# Altium PCB base_led_cube.PcbDoc
Units mil, origin at the board's own origin, x right, y up, seen from the top; angles counter-clockwise.
Board outline 4915 x 2750 mil, 2 copper layers (Top Layer, Bottom Layer); 90 components, 154 nets, 315 pads, 0 vias.
Unrouted connection lines stored in the file: 1.
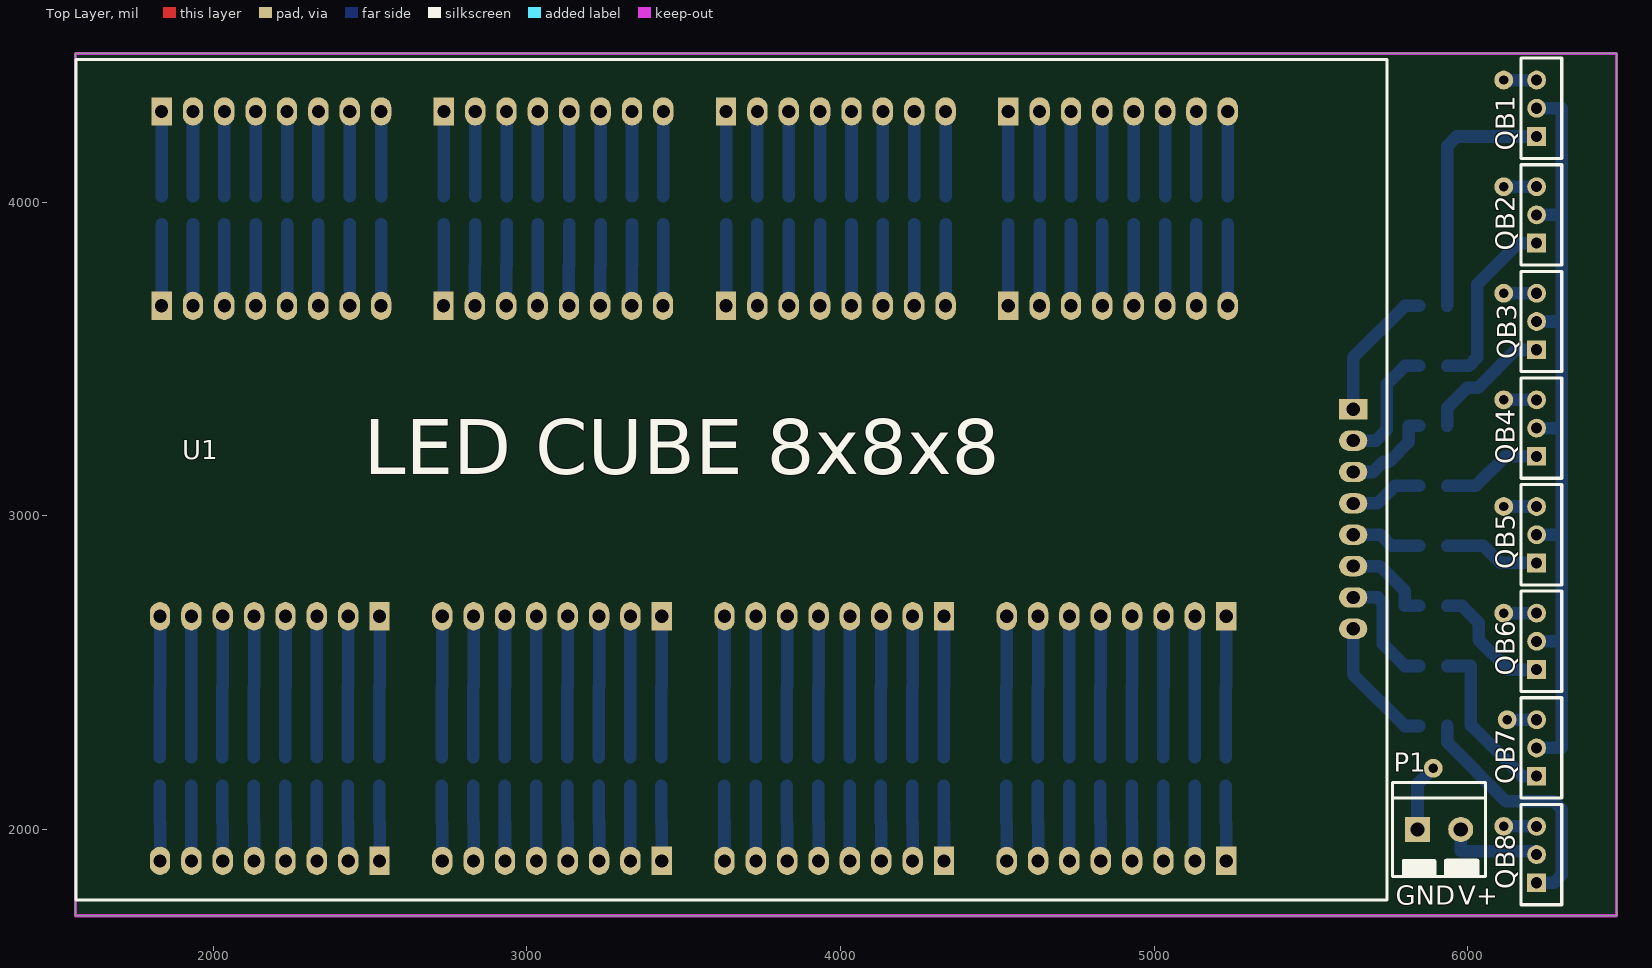
[diagram p0: Top Layer view]
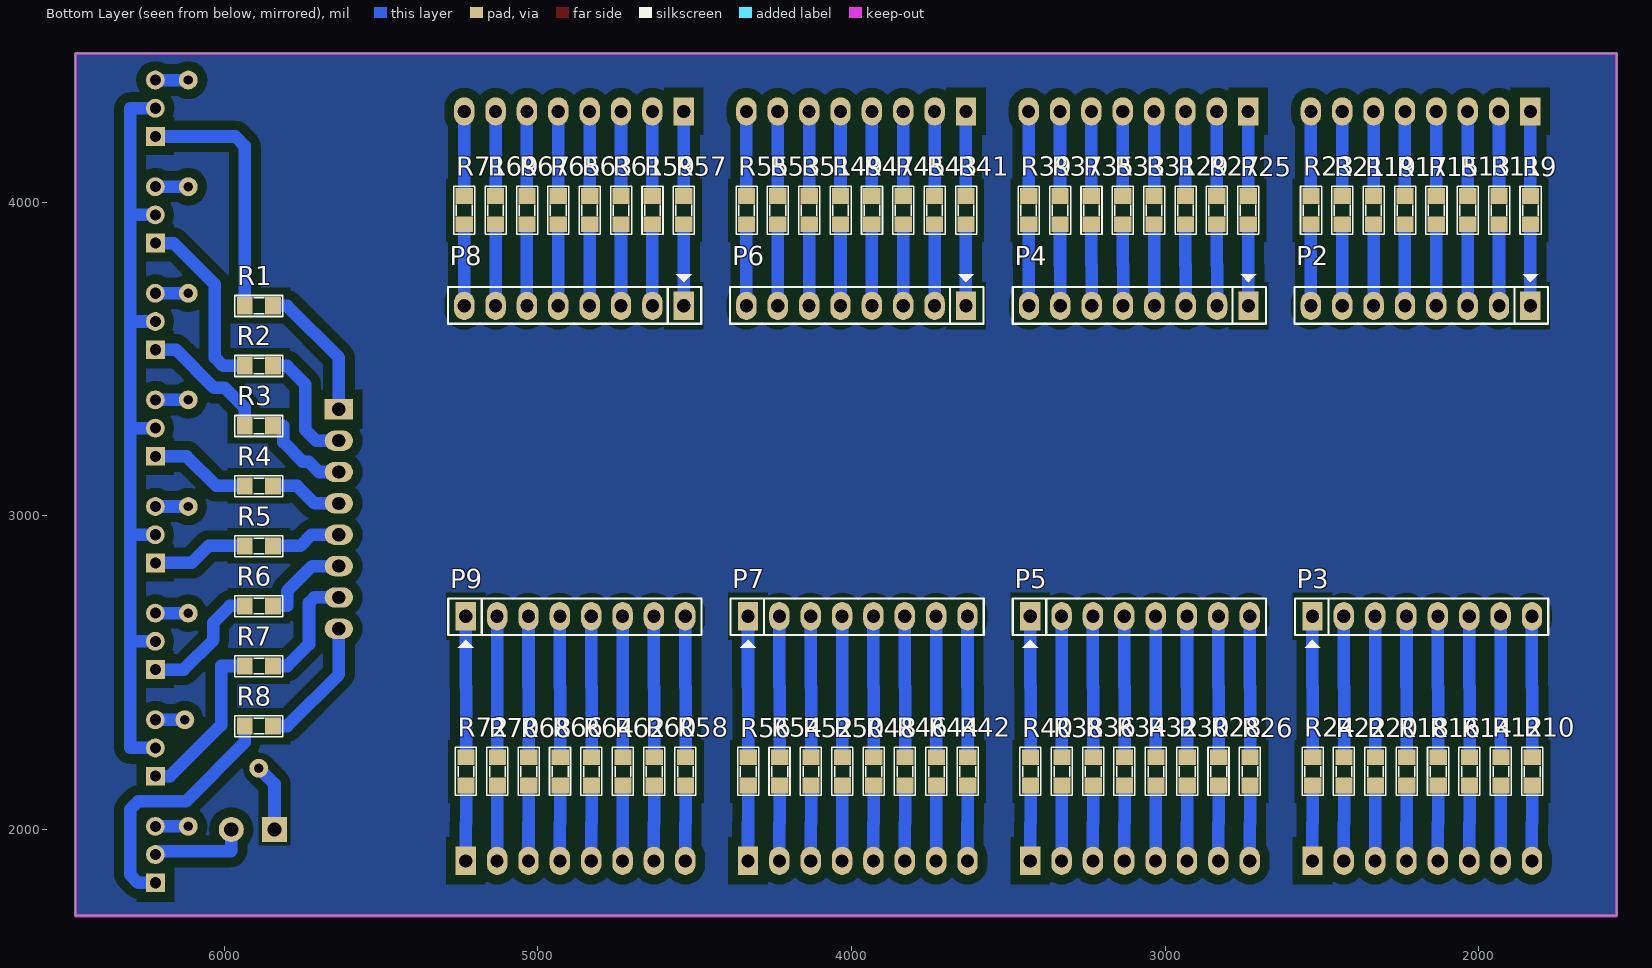
[diagram p1: Bottom Layer view, seen from below]
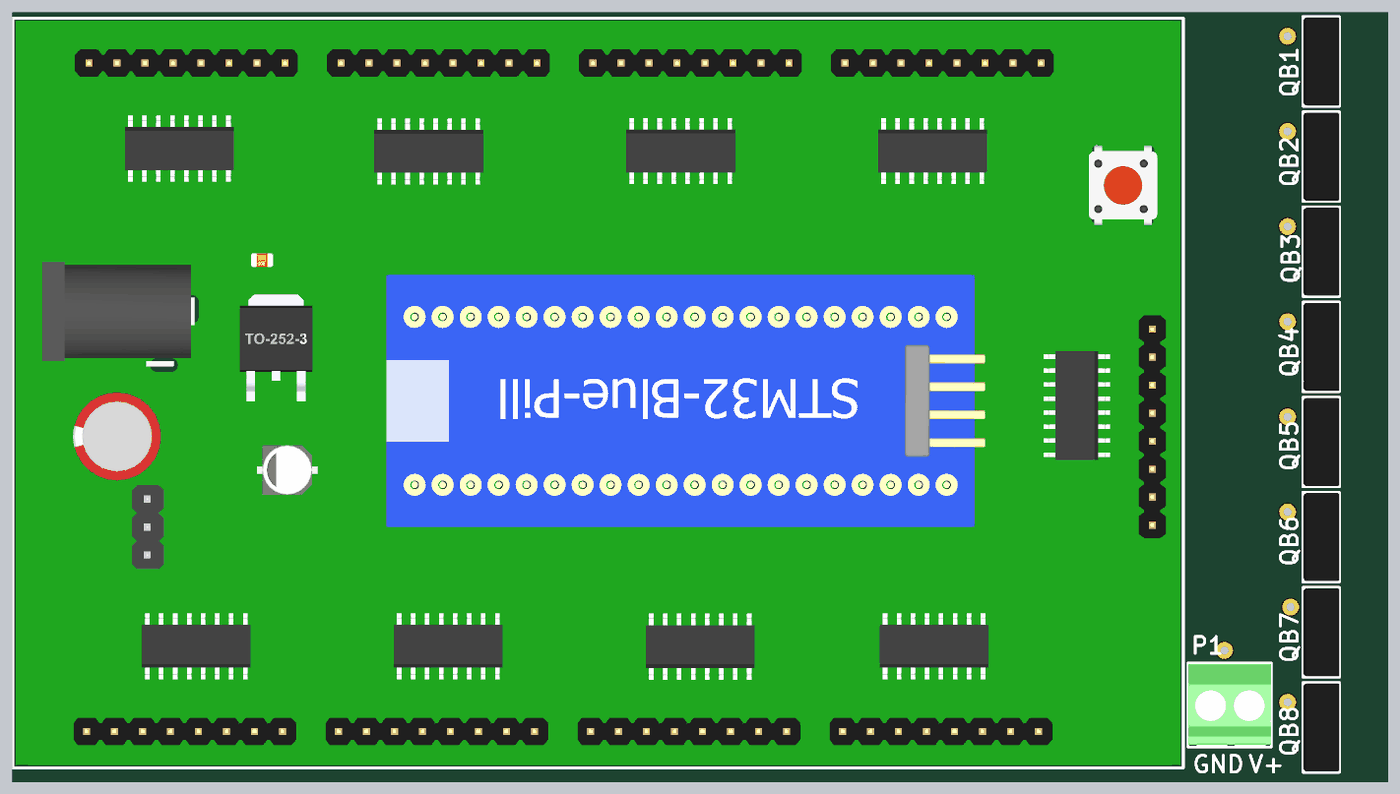
[diagram p2: 3D render of the assembled board from above, using the file's embedded part models]
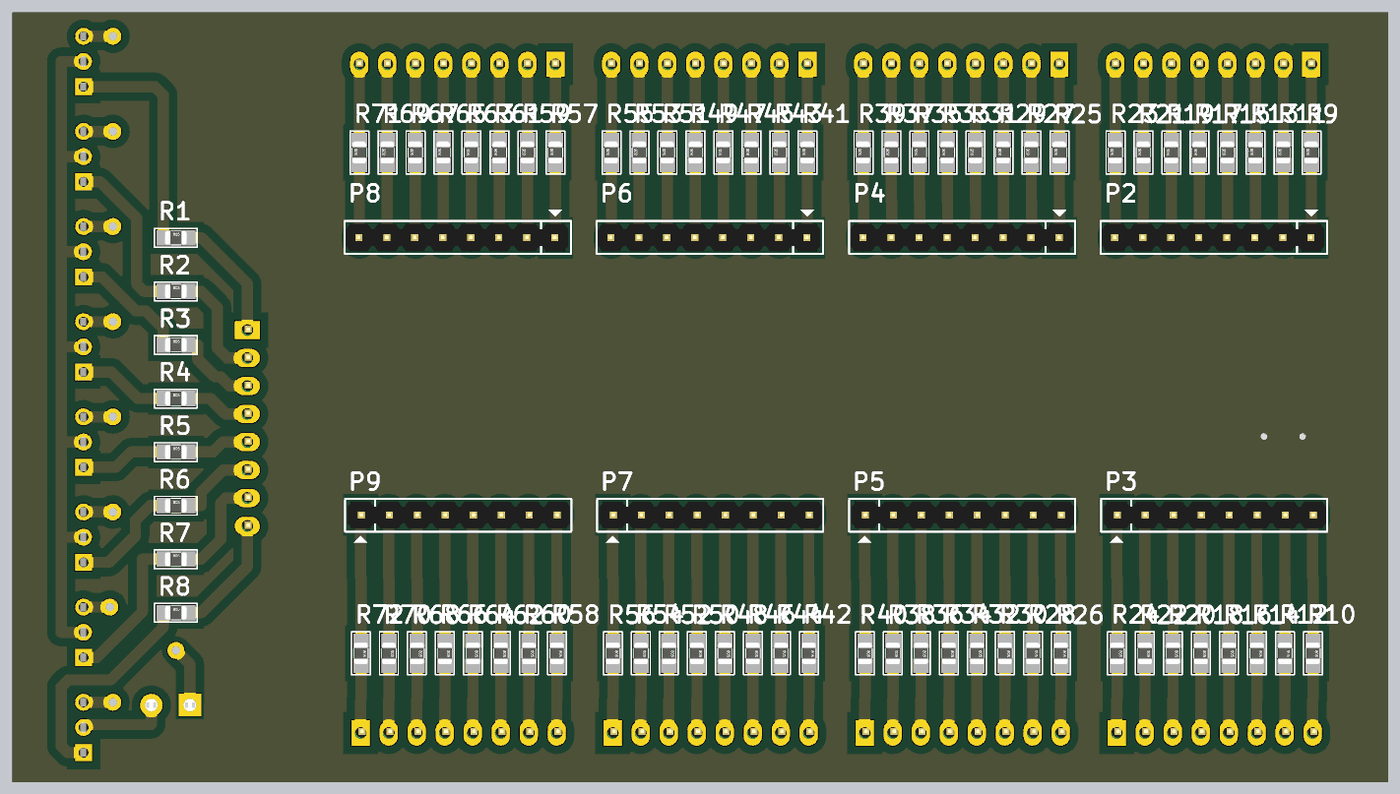
[diagram p3: 3D render of the assembled board from below, using the file's embedded part models]

## Layer stack, top to bottom
Top Solder: solder mask 0.4, Solder Resist, Dk 3.5
Top Layer: signal copper 1.4
Dielectric 1: dielectric 12.6, FR-4, Dk 4.8
Bottom Layer: signal copper 1.4
Bottom Solder: solder mask 0.4, Solder Resist, Dk 3.5

## Board outline
1560,1725 6475,1725 6475,4475 1560,4475

## Design rules (kind name [scope] priority, off if disabled: settings)
Clearance [All] p1: gap=30 ignorepadtopadclearanceinfootprint=FALSE
PolygonConnect [All] p1: connectstyle=Relief reliefconductorwidth=10 reliefentries=4 polygonreliefangle="90 Angle" airgapwidth=10
RoutingVias [All] p1: holewidth=28 width=50 viastyle="Through Hole" minholewidth=28 minwidth=50 maxholewidth=28 maxwidth=50
SolderMaskExpansion [All] p1: expansion=4
Width [All] p1: maxlimit=100 minlimit=10 preferedwidth=40
30 further rules are at their usual default settings.

## Components (designator, comment, footprint, x,y, rotation, side; value= is the part's Value field where it differs from the comment)
P1 "Domino 2" "DOMINO SMALL 2" 5840,2050 r0 top
P2 "Header 8" JP8 1835,3670 r0 bottom
P3 "Header 8" JP8 2530,2680 r180 bottom
P4 "Header 8" JP8 2734,3670 r0 bottom
P5 "Header 8" JP8 3430,2680 r180 bottom
P6 "Header 8" JP8 3635,3670 r0 bottom
P7 "Header 8" JP8 4330,2680 r180 bottom
P8 "Header 8" JP8 4535,3670 r0 bottom
P9 "Header 8" JP8 5230,2680 r180 bottom
QB1 "B772" To-126 6220,4210 r90 top
QB2 "B772" To-126 6220,3870 r90 top
QB3 "B772" To-126 6220,3530 r90 top
QB4 "B772" To-126 6220,3190 r90 top
QB5 "B772" To-126 6220,2850 r90 top
QB6 "B772" To-126 6220,2510 r90 top
QB7 "B772" To-126 6220,2170 r90 top
QB8 "B772" To-126 6220,1830 r90 top
R1 "RESISTOR SMD" RES-SM-0805 5935,3670 r180 bottom value=1K
R2 "RESISTOR SMD" RES-SM-0805 5935,3478.57 r180 bottom value=1K
R3 "RESISTOR SMD" RES-SM-0805 5935,3287.14 r180 bottom value=1K
R4 "RESISTOR SMD" RES-SM-0805 5935,3095.71 r180 bottom value=1K
R5 "RESISTOR SMD" RES-SM-0805 5935,2904.28 r180 bottom value=1K
R6 "RESISTOR SMD" RES-SM-0805 5935,2712.86 r180 bottom value=1K
R7 "RESISTOR SMD" RES-SM-0805 5935,2521.43 r180 bottom value=1K
R8 "RESISTOR SMD" RES-SM-0805 5935,2330 r180 bottom value=1K
R9 "RESISTOR SMD" RES-SM-0805 1835,3930 r90 bottom value=100
R10 "RESISTOR SMD" RES-SM-0805 1829,2230 r270 bottom value=100
R11 "RESISTOR SMD" RES-SM-0805 1935,3930 r90 bottom value=100
R12 "RESISTOR SMD" RES-SM-0805 1929,2230 r270 bottom value=100
R13 "RESISTOR SMD" RES-SM-0805 2035,3930 r90 bottom value=100
R14 "RESISTOR SMD" RES-SM-0805 2029,2230 r270 bottom value=100
R15 "RESISTOR SMD" RES-SM-0805 2135,3930 r90 bottom value=100
R16 "RESISTOR SMD" RES-SM-0805 2129,2230 r270 bottom value=100
R17 "RESISTOR SMD" RES-SM-0805 2235,3930 r90 bottom value=100
R18 "RESISTOR SMD" RES-SM-0805 2229,2230 r270 bottom value=100
R19 "RESISTOR SMD" RES-SM-0805 2335,3930 r90 bottom value=100
R20 "RESISTOR SMD" RES-SM-0805 2329,2230 r270 bottom value=100
R21 "RESISTOR SMD" RES-SM-0805 2435,3930 r90 bottom value=100
R22 "RESISTOR SMD" RES-SM-0805 2429,2230 r270 bottom value=100
R23 "RESISTOR SMD" RES-SM-0805 2535,3930 r90 bottom value=100
R24 "RESISTOR SMD" RES-SM-0805 2529,2230 r270 bottom value=100
R25 "RESISTOR SMD" RES-SM-0805 2735,3930 r90 bottom value=100
R26 "RESISTOR SMD" RES-SM-0805 2729,2230 r270 bottom value=100
R27 "RESISTOR SMD" RES-SM-0805 2835,3930 r90 bottom value=100
R28 "RESISTOR SMD" RES-SM-0805 2829,2230 r270 bottom value=100
R29 "RESISTOR SMD" RES-SM-0805 2935,3930 r90 bottom value=100
R30 "RESISTOR SMD" RES-SM-0805 2929,2230 r270 bottom value=100
R31 "RESISTOR SMD" RES-SM-0805 3035,3930 r90 bottom value=100
R32 "RESISTOR SMD" RES-SM-0805 3029,2230 r270 bottom value=100
R33 "RESISTOR SMD" RES-SM-0805 3135,3930 r90 bottom value=100
R34 "RESISTOR SMD" RES-SM-0805 3129,2230 r270 bottom value=100
R35 "RESISTOR SMD" RES-SM-0805 3235,3930 r90 bottom value=100
R36 "RESISTOR SMD" RES-SM-0805 3229,2230 r270 bottom value=100
R37 "RESISTOR SMD" RES-SM-0805 3335,3930 r90 bottom value=100
R38 "RESISTOR SMD" RES-SM-0805 3329,2230 r270 bottom value=100
R39 "RESISTOR SMD" RES-SM-0805 3435,3930 r90 bottom value=100
R40 "RESISTOR SMD" RES-SM-0805 3429,2230 r270 bottom value=100
R41 "RESISTOR SMD" RES-SM-0805 3635,3930 r90 bottom value=100
R42 "RESISTOR SMD" RES-SM-0805 3629,2230 r270 bottom value=100
R43 "RESISTOR SMD" RES-SM-0805 3735,3930 r90 bottom value=100
R44 "RESISTOR SMD" RES-SM-0805 3729,2230 r270 bottom value=100
R45 "RESISTOR SMD" RES-SM-0805 3835,3930 r90 bottom value=100
R46 "RESISTOR SMD" RES-SM-0805 3829,2230 r270 bottom value=100
R47 "RESISTOR SMD" RES-SM-0805 3935,3930 r90 bottom value=100
R48 "RESISTOR SMD" RES-SM-0805 3929,2230 r270 bottom value=100
R49 "RESISTOR SMD" RES-SM-0805 4035,3930 r90 bottom value=100
R50 "RESISTOR SMD" RES-SM-0805 4029,2230 r270 bottom value=100
R51 "RESISTOR SMD" RES-SM-0805 4135,3930 r90 bottom value=100
R52 "RESISTOR SMD" RES-SM-0805 4129,2230 r270 bottom value=100
R53 "RESISTOR SMD" RES-SM-0805 4235,3930 r90 bottom value=100
R54 "RESISTOR SMD" RES-SM-0805 4229,2230 r270 bottom value=100
R55 "RESISTOR SMD" RES-SM-0805 4335,3930 r90 bottom value=100
R56 "RESISTOR SMD" RES-SM-0805 4329,2230 r270 bottom value=100
R57 "RESISTOR SMD" RES-SM-0805 4535,3930 r90 bottom value=100
R58 "RESISTOR SMD" RES-SM-0805 4529,2230 r270 bottom value=100
R59 "RESISTOR SMD" RES-SM-0805 4635,3930 r90 bottom value=100
R60 "RESISTOR SMD" RES-SM-0805 4629,2230 r270 bottom value=100
R61 "RESISTOR SMD" RES-SM-0805 4735,3930 r90 bottom value=100
R62 "RESISTOR SMD" RES-SM-0805 4729,2230 r270 bottom value=100
R63 "RESISTOR SMD" RES-SM-0805 4835,3930 r90 bottom value=100
R64 "RESISTOR SMD" RES-SM-0805 4829,2230 r270 bottom value=100
R65 "RESISTOR SMD" RES-SM-0805 4935,3930 r90 bottom value=100
R66 "RESISTOR SMD" RES-SM-0805 4929,2230 r270 bottom value=100
R67 "RESISTOR SMD" RES-SM-0805 5035,3930 r90 bottom value=100
R68 "RESISTOR SMD" RES-SM-0805 5029,2230 r270 bottom value=100
R69 "RESISTOR SMD" RES-SM-0805 5135,3930 r90 bottom value=100
R70 "RESISTOR SMD" RES-SM-0805 5129,2230 r270 bottom value=100
R71 "RESISTOR SMD" RES-SM-0805 5235,3930 r90 bottom value=100
R72 "RESISTOR SMD" RES-SM-0805 5229,2230 r270 bottom value=100
U1 "LedCubeDriver" "LED CUBE Driver" 3732.5,3095 r0 top

## Footprints (in the part's own frame and the unit in brackets; to place one, negate y for a bottom-side part, rotate by r counter-clockwise, add the part's x,y. Pads: shape width x height; smd on the part's side, far side on the other; paste and mask are expansions set on the pad)
"DOMINO SMALL 2" [mil] "3.5 mm"
  rect 80x80 hole 45: 1(0,-50)
  round 80 hole 45: 2(137.8,-50)
  silkscreen extent -80,-203 217,100, body extent -79,-192 217,95, height 335
JP8 [mil] "JP8"
  rect 65x90 hole 42: 1(0,0)
  oval 65x90 hole 42: 2(100,0) 3(200,0) 4(300,0) 5(400,0) 6(500,0) 7(600,0) 8(700,0)
  silkscreen extent -56,-100 752,57, body extent -48,-50 748,48, height 323
"LED CUBE Driver" [mil] "8x8x8"
  rect 65x90 hole 42: 1(-1897.5,1195) 9(-997.5,1195) 17(-97.5,1195) 25(802.5,1195) 33(1497.5,-1195) 41(597.5,-1195) 49(-302.5,-1195) 57(-1202.5,-1195)
  oval 65x90 hole 42: 2(-1797.5,1195) 3(-1697.5,1195) 4(-1597.5,1195) 5(-1497.5,1195) 6(-1397.5,1195) 7(-1297.5,1195) 8(-1197.5,1195) 10(-897.5,1195) 11(-797.5,1195) 12(-697.5,1195) 13(-597.5,1195) 14(-497.5,1195) 15(-397.5,1195) 16(-297.5,1195) 18(2.5,1195) 19(102.5,1195) 20(202.5,1195) 21(302.5,1195) 22(402.5,1195) 23(502.5,1195) 24(602.5,1195) 26(902.5,1195) 27(1002.5,1195) 28(1102.5,1195) 29(1202.5,1195) 30(1302.5,1195) 31(1402.5,1195) 32(1502.5,1195) 34(1397.5,-1195) 35(1297.5,-1195) 36(1197.5,-1195) 37(1097.5,-1195) 38(997.5,-1195) 39(897.5,-1195) 40(797.5,-1195) 42(497.5,-1195) 43(397.5,-1195) 44(297.5,-1195) 45(197.5,-1195) 46(97.5,-1195) 47(-2.5,-1195) 48(-102.5,-1195) 50(-402.5,-1195) 51(-502.5,-1195) 52(-602.5,-1195) 53(-702.5,-1195) 54(-802.5,-1195) 55(-902.5,-1195) 56(-1002.5,-1195) 58(-1302.5,-1195) 59(-1402.5,-1195) 60(-1502.5,-1195) 61(-1602.5,-1195) 62(-1702.5,-1195) 63(-1802.5,-1195) 64(-1902.5,-1195)
  rect 90x65 hole 42: 65(1902.5,245)
  oval 90x65 hole 42: 66(1902.5,145) 67(1902.5,45) 68(1902.5,-55) 69(1902.5,-155) 70(1902.5,-255) 71(1902.5,-355) 72(1902.5,-455)
  silkscreen extent -2170,-1320 2010,1360, body extent -2160,-1310 2000,1350, height 596
RES-SM-0805 [mil]
  rect 50x55 smd: 1(0,0) 2(90,0)
  silkscreen extent -32,-34 121,33, body extent 6,-25 84,25, height 31
To-126 [mil] "transistor footprint"
  rect 60x60 hole 35.43: 1(0,0)
  round 60 hole 35.43: 2(90,0) 3(180,0)
  silkscreen extent -70,-80 250,50, body extent -67,-80 247,48, height 557

## Part data
P1: "Domino, 2-Pin", LatestRevisionDate=17-Jul-2002, LatestRevisionNote="Re-released for DXP Platform.", Publisher="Altium Limited"
P2 P3 P4 P5 P6 P7 P8 P9: "Header, 8-Pin", LatestRevisionDate=17-Jul-2002, LatestRevisionNote="Re-released for DXP Platform.", Publisher="Altium Limited"
QB1 QB2 QB3 QB4 QB5 QB6 QB7 QB8: library part 2SB772, "PNP 30V - 3A"
R1 R2 R3 R4 R5 R6 R7 R8 R9 R10 R11 R12 R13 R14 R15 R16 R17 R18 R19 R20 R21 R22 R23 R24 R25 R26 R27 R28 R29 R30 R31 R32 R33 R34 R35 R36 R37 R38 R39 R40 R41 R42 R43 R44 R45 R46 R47 R48 R49 R50 R51 R52 R53 R54 R55 R56 R57 R58 R59 R60 R61 R62 R63 R64 R65 R66 R67 R68 R69 R70 R71 R72: "Resistor"
U1: library part "LED Cube Driver"

## Free pads (board coordinates)
  round 60 hole 30: 25(6115,4390) 26(6115,4050) 27(6115,3710) 28(6115,3370) 30(6115,3030) 32(6115,2690) 33(6125.71,2350) 34(6115,2010) 35(5890,2195)

## Nets (pads, with @x,y where several pads share a name; then routed paths per layer and width w, separated by ;. In a path a pad name is that pad's centre, name@x,y a point inside that pad or via, vN(x,y) a via of type N, cw(c..) or ccw(c..) an arc to the next point about the centre after c; other vN are vias at no path point)
GND: P1.1 pad.35 | length 215.7
  Bottom Layer w40: P1.1 5840,2145 pad.35
L1: P2.1 R9.1 | length 260
  Bottom Layer w40: P2.1 R9.1
L2: P2.2 R11.1 | length 260
  Bottom Layer w40: P2.2 R11.1
L3: P2.3 R13.1 | length 260
  Bottom Layer w40: P2.3 R13.1
L4: P2.4 R15.1 | length 260
  Bottom Layer w40: P2.4 R15.1
L5: P2.5 R17.1 | length 260
  Bottom Layer w40: P2.5 R17.1
L6: P2.6 R19.1 | length 260
  Bottom Layer w40: P2.6 R19.1
L7: P2.7 R21.1 | length 260
  Bottom Layer w40: P2.7 R21.1
L8: P2.8 R23.1 | length 260
  Bottom Layer w40: P2.8 R23.1
L9: P4.1 R25.1 | length 260.4
  Bottom Layer w40: P4.1 2734,3800 2735,3801 R25.1
L10: P4.2 R27.1 | length 260.4
  Bottom Layer w40: P4.2 2834,3800 2835,3801 R27.1
L11: P4.3 R29.1 | length 260.4
  Bottom Layer w40: P4.3 2934,3800 2935,3801 R29.1
L12: P4.4 R31.1 | length 260.4
  Bottom Layer w40: P4.4 3034,3800 3035,3801 R31.1
L13: P4.5 R33.1 | length 260.4
  Bottom Layer w40: P4.5 3134,3800 3135,3801 R33.1
L14: P4.6 R35.1 | length 260.4
  Bottom Layer w40: P4.6 3234,3800 3235,3801 R35.1
L15: P4.7 R37.1 | length 260.4
  Bottom Layer w40: P4.7 3334,3800 3335,3801 R37.1
L16: P4.8 R39.1 | length 260.4
  Bottom Layer w40: P4.8 3434,3800 3435,3801 R39.1
L17: P6.1 R41.1 | length 260
  Bottom Layer w40: P6.1 R41.1
L18: P6.2 R43.1 | length 260
  Bottom Layer w40: P6.2 R43.1
L19: P6.3 R45.1 | length 260
  Bottom Layer w40: P6.3 R45.1
L20: P6.4 R47.1 | length 260
  Bottom Layer w40: P6.4 R47.1
L21: P6.5 R49.1 | length 260
  Bottom Layer w40: P6.5 R49.1
L22: P6.6 R51.1 | length 260
  Bottom Layer w40: P6.6 R51.1
L23: P6.7 R53.1 | length 260
  Bottom Layer w40: P6.7 R53.1
L24: P6.8 R55.1 | length 260
  Bottom Layer w40: P6.8 R55.1
L25: P8.1 R57.1 | length 260
  Bottom Layer w40: P8.1 R57.1
L26: P8.2 R59.1 | length 260
  Bottom Layer w40: P8.2 R59.1
L27: P8.3 R61.1 | length 260
  Bottom Layer w40: P8.3 R61.1
L28: P8.4 R63.1 | length 260
  Bottom Layer w40: P8.4 R63.1
L29: P8.5 R65.1 | length 260
  Bottom Layer w40: P8.5 R65.1
L30: P8.6 R67.1 | length 260
  Bottom Layer w40: P8.6 R67.1
L31: P8.7 R69.1 | length 260
  Bottom Layer w40: P8.7 R69.1
L32: P8.8 R71.1 | length 260
  Bottom Layer w40: P8.8 R71.1
L33: P9.1 R72.1 | length 450.4
  Bottom Layer w40: R72.1 5229,2455 5230,2456 P9.1
L34: P9.2 R70.1 | length 450.4
  Bottom Layer w40: R70.1 5129,2455 5130,2456 P9.2
L35: P9.3 R68.1 | length 450.4
  Bottom Layer w40: R68.1 5029,2455 5030,2456 P9.3
L36: P9.4 R66.1 | length 450.4
  Bottom Layer w40: R66.1 4929,2455 4930,2456 P9.4
L37: P9.5 R64.1 | length 450.4
  Bottom Layer w40: R64.1 4829,2455 4830,2456 P9.5
L38: P9.6 R62.1 | length 450.4
  Bottom Layer w40: R62.1 4729,2455 4730,2456 P9.6
L39: P9.7 R60.1 | length 450.4
  Bottom Layer w40: R60.1 4629,2455 4630,2456 P9.7
L40: P9.8 R58.1 | length 450.4
  Bottom Layer w40: R58.1 4529,2455 4530,2456 P9.8
L41: P7.1 R56.1 | length 450.4
  Bottom Layer w40: R56.1 4329,2455 4330,2456 P7.1
L42: P7.2 R54.1 | length 450.4
  Bottom Layer w40: R54.1 4229,2455 4230,2456 P7.2
L43: P7.3 R52.1 | length 450.4
  Bottom Layer w40: R52.1 4129,2455 4130,2456 P7.3
L44: P7.4 R50.1 | length 450.4
  Bottom Layer w40: R50.1 4029,2455 4030,2456 P7.4
L45: P7.5 R48.1 | length 450.4
  Bottom Layer w40: R48.1 3929,2455 3930,2456 P7.5
L46: P7.6 R46.1 | length 450.4
  Bottom Layer w40: R46.1 3829,2455 3830,2456 P7.6
L47: P7.7 R44.1 | length 450.4
  Bottom Layer w40: R44.1 3729,2455 3730,2456 P7.7
L48: P7.8 R42.1 | length 450.4
  Bottom Layer w40: R42.1 3629,2455 3630,2456 P7.8
L49: P5.1 R40.1 | length 450.4
  Bottom Layer w40: R40.1 3429,2455 3430,2456 P5.1
L50: P5.2 R38.1 | length 450.4
  Bottom Layer w40: R38.1 3329,2455 3330,2456 P5.2
L51: P5.3 R36.1 | length 450.4
  Bottom Layer w40: R36.1 3229,2455 3230,2456 P5.3
L52: P5.4 R34.1 | length 450.4
  Bottom Layer w40: R34.1 3129,2455 3130,2456 P5.4
L53: P5.5 R32.1 | length 450.4
  Bottom Layer w40: R32.1 3029,2455 3030,2456 P5.5
L54: P5.6 R30.1 | length 450.4
  Bottom Layer w40: R30.1 2929,2455 2930,2456 P5.6
L55: P5.7 R28.1 | length 450.4
  Bottom Layer w40: R28.1 2829,2455 2830,2456 P5.7
L56: P5.8 R26.1 | length 450.4
  Bottom Layer w40: R26.1 2729,2455 2730,2456 P5.8
L57: P3.1 R24.1 | length 450.4
  Bottom Layer w40: R24.1 2529,2455 2530,2456 P3.1
L58: P3.2 R22.1 | length 450.4
  Bottom Layer w40: R22.1 2429,2455 2430,2456 P3.2
L59: P3.3 R20.1 | length 450.4
  Bottom Layer w40: R20.1 2329,2455 2330,2456 P3.3
L60: P3.4 R18.1 | length 450.4
  Bottom Layer w40: R18.1 2229,2455 2230,2456 P3.4
L61: P3.5 R16.1 | length 450.4
  Bottom Layer w40: R16.1 2129,2455 2130,2456 P3.5
L62: P3.6 R14.1 | length 450.4
  Bottom Layer w40: R14.1 2029,2455 2030,2456 P3.6
L63: P3.7 R12.1 | length 450.4
  Bottom Layer w40: R12.1 1929,2455 1930,2456 P3.7
L64: P3.8 R10.1 | length 450.4
  Bottom Layer w40: R10.1 1829,2455 1830,2456 P3.8
Layer1: pad.25 QB1.3 | length 105
  Bottom Layer w40: pad.25 QB1.3
Layer1_Ctrl: QB1.1 R1.1 | length 807.4
  Bottom Layer w40: R1.1 5935,4180 5965,4210 QB1.1
Layer2: pad.26 QB2.3 | length 105
  Bottom Layer w40: pad.26 QB2.3
Layer2_Ctrl: QB2.1 R2.1 | length 583.7
  Bottom Layer w40: R2.1 6003.57,3478.57 6030,3505 6030,3738.14 6161.86,3870 QB2.1
Layer3: pad.27 QB3.3 | length 105
  Bottom Layer w40: pad.27 QB3.3
Layer3_Ctrl: QB3.1 R3.1 | length 419.5
  Bottom Layer w40: R3.1 5935,3345 5998.57,3408.57 6032.57,3408.57 6153.99,3530 QB3.1
Layer4: pad.28 QB4.3 | length 105
  Bottom Layer w40: pad.28 QB4.3
Layer4_Ctrl: QB4.1 R4.1 | length 324.1
  Bottom Layer w40: R4.1 6025.71,3095.71 6120,3190 QB4.1
Layer5: pad.30 QB5.3 | length 105
  Bottom Layer w40: pad.30 QB5.3
Layer5_Ctrl: QB5.1 R5.1 | length 307.5
  Bottom Layer w40: R5.1 6050,2904.29 6104.29,2850 QB5.1
Layer6: pad.32 QB6.3 | length 105
  Bottom Layer w40: pad.32 QB6.3
Layer6_Ctrl: QB6.1 R6.1 | length 401.2
  Bottom Layer w40: R6.1 5982.14,2712.86 6035,2660 6035,2605 6130,2510 QB6.1
Layer7: pad.33 QB7.3 | length 94.3
  Bottom Layer w40: pad.33 QB7.3
Layer7_Ctrl: QB7.1 R7.1 | length 540.9
  Bottom Layer w40: R7.1 6010,2521.43 6010,2333 6173,2170 QB7.1
Layer8: pad.34 QB8.3 | length 105
  Bottom Layer w40: pad.34 QB8.3
Layer8_Ctrl: QB8.1 R8.1 | length 805.6
  Bottom Layer w40: R8.1 5935,2278 6123,2090 6275,2090 6300,2065 6300,1855 6275,1830 QB8.1
NetR1_2: R1.2 U1.65 | length 443.3
  Bottom Layer w40: U1.65 5635,3505 5800,3670 R1.2
NetR2_2: R2.2 U1.66 | length 394.1
  Bottom Layer w40: U1.66 5707,3240 5742,3275 5742,3420.57 5800,3478.57 R2.2
NetR3_2: R3.2 U1.67 | length 301.5
  Bottom Layer w40: U1.67 5698,3140 5731,3173 5750,3173 5812,3235 5812,3287.14 R3.2
NetR4_2: R4.2 U1.68 | length 233.1
  Bottom Layer w40: U1.68 5712,3040 5767.71,3095.71 R4.2
NetR5_2: R5.2 U1.69 | length 224.8
  Bottom Layer w40: U1.69 5722,2940 5757.71,2904.29 R5.2
NetR6_2: R6.2 U1.70 | length 290.3
  Bottom Layer w40: U1.70 5720,2840 5800,2760 5800,2712.86 R6.2
NetR7_2: R7.2 U1.71 | length 377.6
  Bottom Layer w40: U1.71 5713,2740 5730,2723 5730,2591.43 5800,2521.43 R7.2
NetR8_2: R8.2 U1.72 | length 423.3
  Bottom Layer w40: U1.72 5635,2495 5800,2330 R8.2
NetR9_2: R9.2 U1.1 | length 270
  Bottom Layer w40: R9.2 U1.1
NetR10_2: R10.2 U1.64 | length 240.4
  Bottom Layer w40: R10.2 1829,2021 1830,2020 U1.64
NetR11_2: R11.2 U1.2 | length 270
  Bottom Layer w40: R11.2 U1.2
NetR12_2: R12.2 U1.63 | length 240.4
  Bottom Layer w40: R12.2 1929,2021 1930,2020 U1.63
NetR13_2: R13.2 U1.3 | length 270
  Bottom Layer w40: R13.2 U1.3
NetR14_2: R14.2 U1.62 | length 240.4
  Bottom Layer w40: R14.2 2029,2021 2030,2020 U1.62
NetR15_2: R15.2 U1.4 | length 270
  Bottom Layer w40: R15.2 U1.4
NetR16_2: R16.2 U1.61 | length 240.4
  Bottom Layer w40: R16.2 2129,2021 2130,2020 U1.61
NetR17_2: R17.2 U1.5 | length 270
  Bottom Layer w40: R17.2 U1.5
NetR18_2: R18.2 U1.60 | length 240.4
  Bottom Layer w40: R18.2 2229,2021 2230,2020 U1.60
NetR19_2: R19.2 U1.6 | length 270
  Bottom Layer w40: R19.2 U1.6
NetR20_2: R20.2 U1.59 | length 240.4
  Bottom Layer w40: R20.2 2329,2021 2330,2020 U1.59
NetR21_2: R21.2 U1.7 | length 270
  Bottom Layer w40: R21.2 U1.7
NetR22_2: R22.2 U1.58 | length 240.4
  Bottom Layer w40: R22.2 2429,2021 2430,2020 U1.58
NetR23_2: R23.2 U1.8 | length 270
  Bottom Layer w40: R23.2 U1.8
NetR24_2: R24.2 U1.57 | length 240.4
  Bottom Layer w40: R24.2 2529,2021 2530,2020 U1.57
NetR25_2: R25.2 U1.9 | length 270
  Bottom Layer w40: R25.2 U1.9
NetR26_2: R26.2 U1.56 | length 240.4
  Bottom Layer w40: R26.2 2729,2021 2730,2020 U1.56
NetR27_2: R27.2 U1.10 | length 270
  Bottom Layer w40: R27.2 U1.10
NetR28_2: R28.2 U1.55 | length 240.4
  Bottom Layer w40: R28.2 2829,2021 2830,2020 U1.55
NetR29_2: R29.2 U1.11 | length 270
  Bottom Layer w40: R29.2 U1.11
NetR30_2: R30.2 U1.54 | length 240.4
  Bottom Layer w40: R30.2 2929,2021 2930,2020 U1.54
NetR31_2: R31.2 U1.12 | length 270
  Bottom Layer w40: R31.2 U1.12
NetR32_2: R32.2 U1.53 | length 240.4
  Bottom Layer w40: R32.2 3029,2021 3030,2020 U1.53
NetR33_2: R33.2 U1.13 | length 270
  Bottom Layer w40: R33.2 U1.13
NetR34_2: R34.2 U1.52 | length 240.4
  Bottom Layer w40: R34.2 3129,2021 3130,2020 U1.52
NetR35_2: R35.2 U1.14 | length 270
  Bottom Layer w40: R35.2 U1.14
NetR36_2: R36.2 U1.51 | length 240.4
  Bottom Layer w40: R36.2 3229,2021 3230,2020 U1.51
NetR37_2: R37.2 U1.15 | length 270
  Bottom Layer w40: R37.2 U1.15
NetR38_2: R38.2 U1.50 | length 240.4
  Bottom Layer w40: R38.2 3329,2021 3330,2020 U1.50
NetR39_2: R39.2 U1.16 | length 270
  Bottom Layer w40: R39.2 U1.16
NetR40_2: R40.2 U1.49 | length 240.4
  Bottom Layer w40: R40.2 3429,2021 3430,2020 U1.49
NetR41_2: R41.2 U1.17 | length 270
  Bottom Layer w40: R41.2 U1.17
NetR42_2: R42.2 U1.48 | length 240.4
  Bottom Layer w40: R42.2 3629,2021 3630,2020 U1.48
NetR43_2: R43.2 U1.18 | length 270
  Bottom Layer w40: R43.2 U1.18
NetR44_2: R44.2 U1.47 | length 240.4
  Bottom Layer w40: R44.2 3729,2021 3730,2020 U1.47
NetR45_2: R45.2 U1.19 | length 270
  Bottom Layer w40: R45.2 U1.19
NetR46_2: R46.2 U1.46 | length 240.4
  Bottom Layer w40: R46.2 3829,2021 3830,2020 U1.46
NetR47_2: R47.2 U1.20 | length 270
  Bottom Layer w40: R47.2 U1.20
NetR48_2: R48.2 U1.45 | length 240.4
  Bottom Layer w40: R48.2 3929,2021 3930,2020 U1.45
NetR49_2: R49.2 U1.21 | length 270
  Bottom Layer w40: R49.2 U1.21
NetR50_2: R50.2 U1.44 | length 240.4
  Bottom Layer w40: R50.2 4029,2021 4030,2020 U1.44
NetR51_2: R51.2 U1.22 | length 270
  Bottom Layer w40: R51.2 U1.22
NetR52_2: R52.2 U1.43 | length 240.4
  Bottom Layer w40: R52.2 4129,2021 4130,2020 U1.43
NetR53_2: R53.2 U1.23 | length 270
  Bottom Layer w40: R53.2 U1.23
NetR54_2: R54.2 U1.42 | length 240.4
  Bottom Layer w40: R54.2 4229,2021 4230,2020 U1.42
NetR55_2: R55.2 U1.24 | length 270
  Bottom Layer w40: R55.2 U1.24
NetR56_2: R56.2 U1.41 | length 240.4
  Bottom Layer w40: R56.2 4329,2021 4330,2020 U1.41
NetR57_2: R57.2 U1.25 | length 270
  Bottom Layer w40: R57.2 U1.25
NetR58_2: R58.2 U1.40 | length 240.4
  Bottom Layer w40: R58.2 4529,2021 4530,2020 U1.40
NetR59_2: R59.2 U1.26 | length 270
  Bottom Layer w40: R59.2 U1.26
NetR60_2: R60.2 U1.39 | length 240.4
  Bottom Layer w40: R60.2 4629,2021 4630,2020 U1.39
NetR61_2: R61.2 U1.27 | length 270
  Bottom Layer w40: R61.2 U1.27
NetR62_2: R62.2 U1.38 | length 240.4
  Bottom Layer w40: R62.2 4729,2021 4730,2020 U1.38
NetR63_2: R63.2 U1.28 | length 270
  Bottom Layer w40: R63.2 U1.28
NetR64_2: R64.2 U1.37 | length 240.4
  Bottom Layer w40: R64.2 4829,2021 4830,2020 U1.37
NetR65_2: R65.2 U1.29 | length 270
  Bottom Layer w40: R65.2 U1.29
NetR66_2: R66.2 U1.36 | length 240.4
  Bottom Layer w40: R66.2 4929,2021 4930,2020 U1.36
NetR67_2: R67.2 U1.30 | length 270
  Bottom Layer w40: R67.2 U1.30
NetR68_2: R68.2 U1.35 | length 240.4
  Bottom Layer w40: R68.2 5029,2021 5030,2020 U1.35
NetR69_2: R69.2 U1.31 | length 270
  Bottom Layer w40: R69.2 U1.31
NetR70_2: R70.2 U1.34 | length 240.4
  Bottom Layer w40: R70.2 5129,2021 5130,2020 U1.34
NetR71_2: R71.2 U1.32 | length 270
  Bottom Layer w40: R71.2 U1.32
NetR72_2: R72.2 U1.33 | length 240.4
  Bottom Layer w40: R72.2 5229,2021 5230,2020 U1.33
V+: P1.2 QB1.2 QB2.2 QB3.2 QB4.2 QB5.2 QB6.2 QB7.2 QB8.2 | length 2919.2
  Bottom Layer w40: P1.2 5977.8,1932.2 5980,1930 6210,1930 QB8.2 ; QB7.2 6300,2260 6300,2600 ; QB6.2 6300,2600 ; QB5.2 6300,2940 ; QB4.2 6295,3280 6300,3285 ; QB3.2 6300,3620 ; QB2.2 6295,3960 6300,3965 ; QB1.2 6300,4300 6300,3965 ; 6300,2600 6300,2940 ; 6300,2940 6300,3285 ; 6300,3285 6300,3620 ; 6300,3620 6300,3965

## Polygon pours and split planes (outlines as drawn)
GND on Bottom Layer (solid, pour order 0): 1560,4475 6475,4475 6475,1725 1560,1725

## Keep-outs
Keep-Out Layer:
  the board outline again, w10

## Silkscreen, mask and mechanical layers (free items; w line width, h text height)
Top Overlay:
  text "LED CUBE 8x8x8" at 2480,3075 h300
  text "GND" at 5770,1760 h60
  text "V+" at 5970,1760 h60